# EAGLE board espduino-01-panel (EAGLE 7.1.0), part 1 of 2
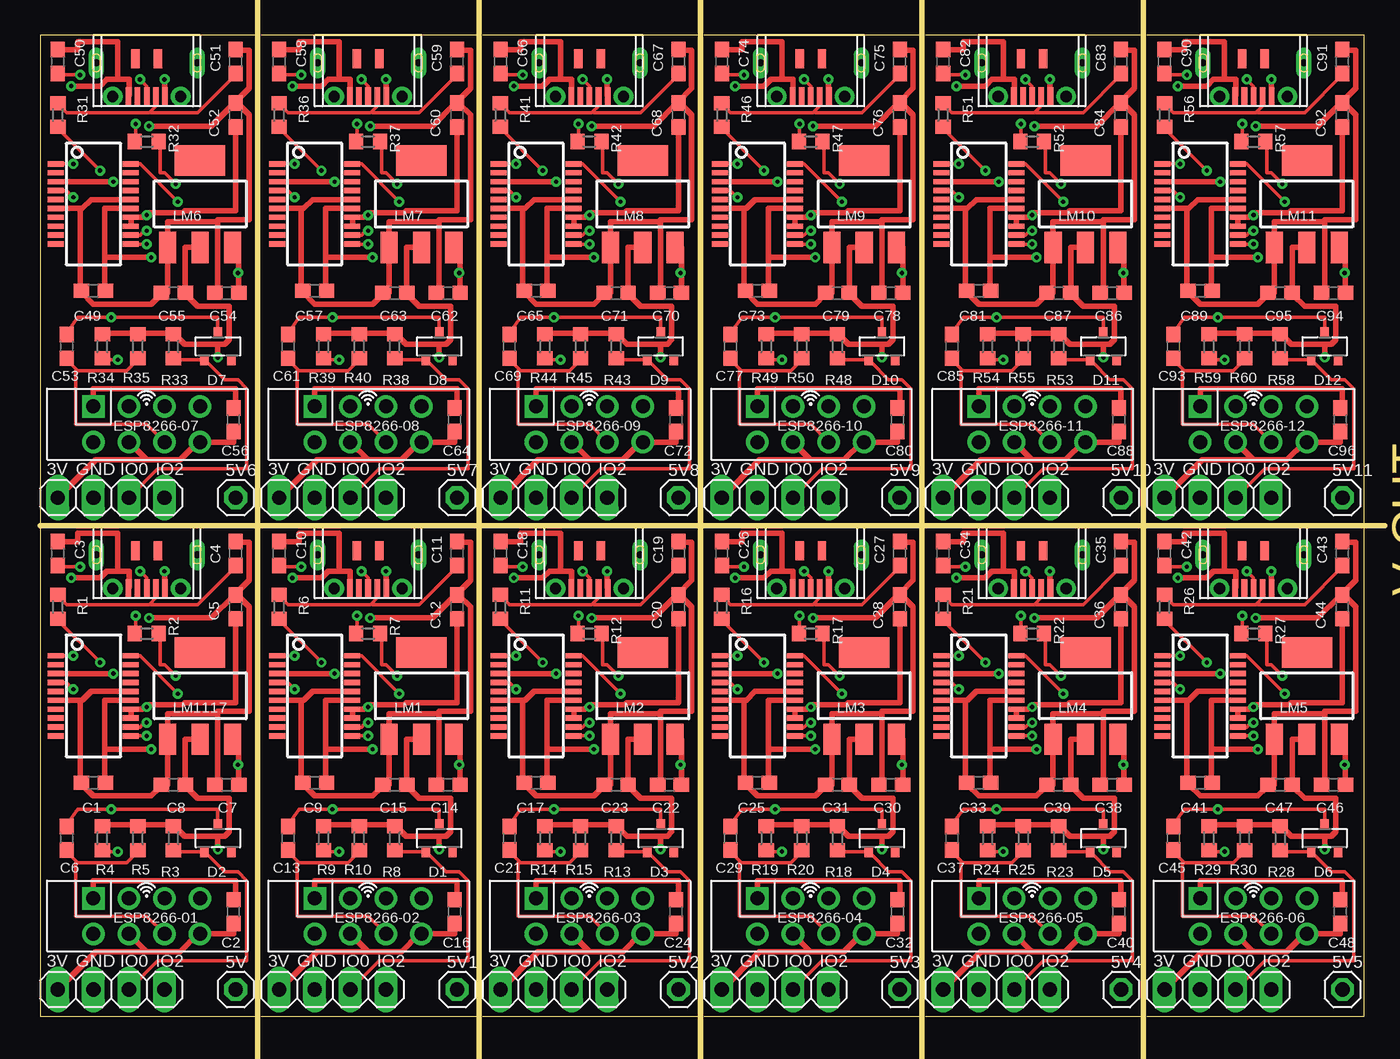
[diagram p0: board, top side]
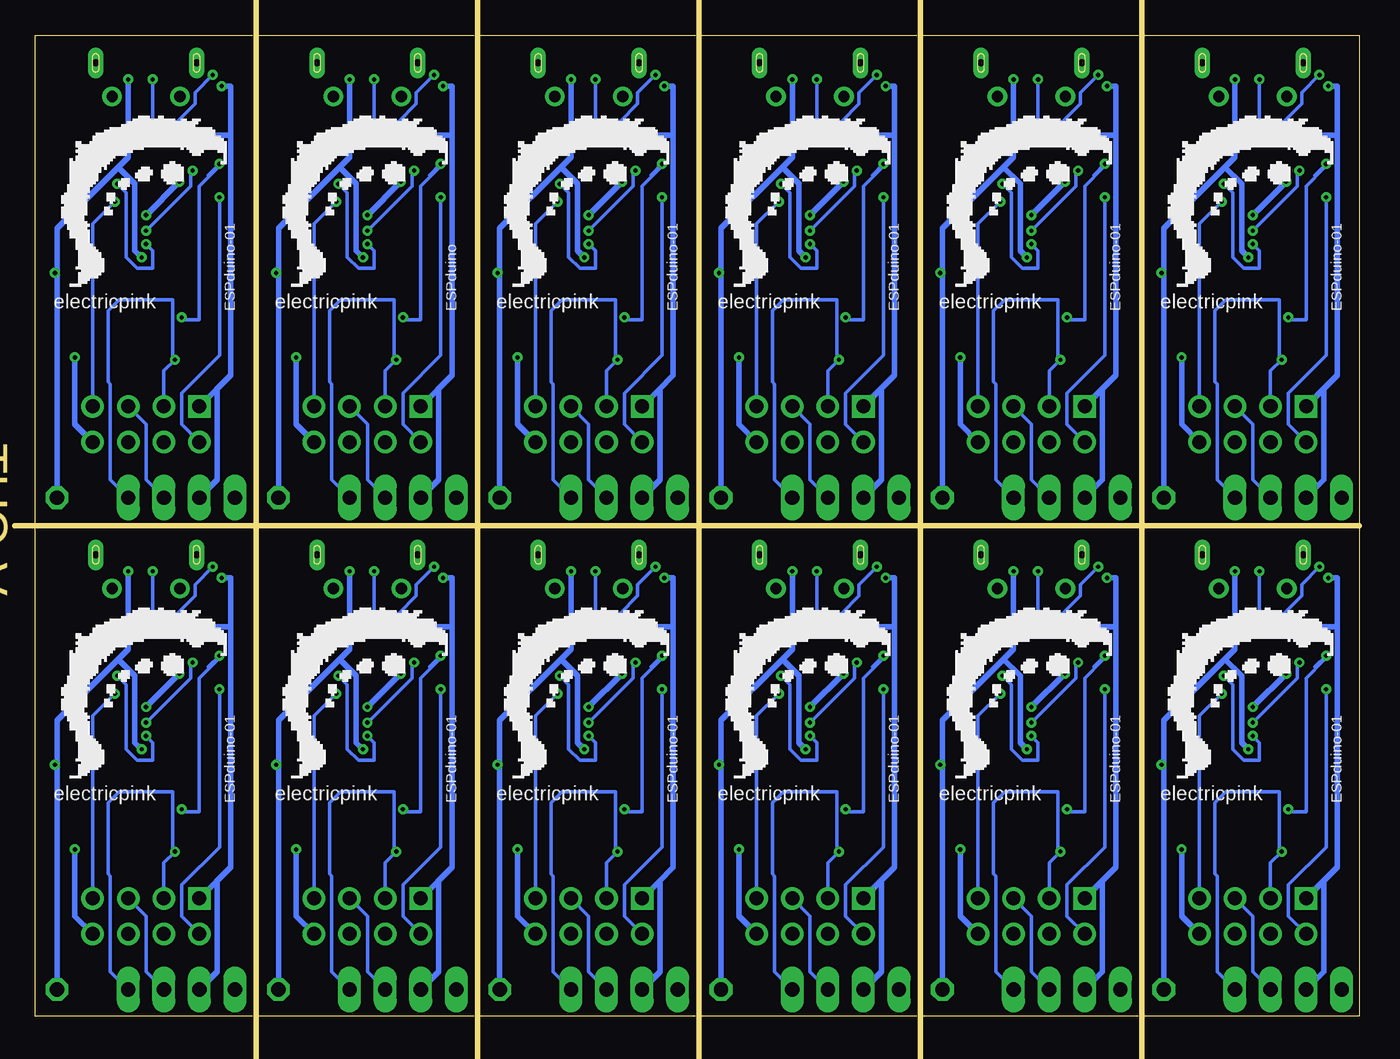
[diagram p1: board, bottom side, seen from below]

Size 94.55 x 70.02 mm. Coordinates in mm from the lower left corner, seen from the top.
Outline: 15.54,0 0,0 0,70.02 15.54,70.02
Outline: 15.8,0 31.34,0
Outline: 31.6,0 47.15,0
Outline: 47.4,0 62.95,0
Outline: 63.2,0 78.75,0
Outline: 79,0 94.55,0 94.55,70.02 79,70.02
Outline: 31.34,70.02 15.8,70.02
Outline: 47.15,70.02 31.6,70.02
Outline: 62.95,70.02 47.4,70.02
Outline: 78.75,70.02 63.2,70.02
Copper layers (1*16): Top 0.035mm / dielectric 1.5mm / Bottom 0.035mm
Design rules "SeeedStudio_2layer_conservative": minimum track width 8mil, minimum drill 12mil, track to track 8mil, track to pad 8mil, pad to pad 8mil, via to via 8mil, smd to smd 0mil, copper to edge 12mil, drill to drill 12mil, minimum pad ring 12mil, minimum via ring 8mil, stop-mask expansion 2mil, vias tented up to drill 100mil, thermal gap 12mil
Net classes: 0 default: width 0.254 mm; 1 POWER: width 0.406 mm
Milling: 6 lines

## Footprints (pad centres in the part's own frame; a part is rotated, then mirrored left to right if it is on the bottom)
1X01 = drill 1.016 octagon: 1 0,0
C0603 = smd 1.1 x 1: 1 -0.85,0; 2 0.85,0
SOT23-R = smd 0.6 x 0.7: 1 -0.95,-1; 2 0.95,-1; 3 0,1
1X04 = drill 1.016 long: 1 -3.81,0; 2 -1.27,0; 3 1.27,0; 4 3.81,0
ESP8266-01-MIN = drill 1: CH_PD -1.27,-1.27; GPIO0 1.27,1.27; GPIO2 -1.27,1.27; RST 1.27,-1.27; RXD 3.81,1.27; TXD -3.81,-1.27; VCC 3.81,-1.27 | drill 1 square: GND -3.81,1.27
SOT223 = smd 1.219 x 2.235: 1 -2.311,-3.099; 2 0,-3.099; 3 2.311,-3.099 | smd 3.6 x 2.2: 4 0,3.099
R0603 = smd 1 x 1.1: 1 -0.85,0; 2 0.85,0
SSOP20_L = smd 0.381 x 1.143: 1 -2.857,-2.68; 2 -2.223,-2.68; 3 -1.587,-2.68; 4 -0.953,-2.68; 5 -0.318,-2.68; 6 0.318,-2.68; 7 0.953,-2.68; 8 1.587,-2.68; 9 2.223,-2.68; 10 2.857,-2.68; 11 2.857,2.68; 12 2.223,2.68; 13 1.587,2.68; 14 0.953,2.68; 15 0.318,2.68; 16 -0.318,2.68; 17 -0.953,2.68; 18 -1.587,2.68; 19 -2.223,2.68; 20 -2.857,2.68
MICRO-USB-A01SB141B1 = smd 0.4 x 1.25: D+ 0,-4.375; D- 0.65,-4.375; GND -1.3,-4.375; ID -0.65,-4.375; VCC 1.3,-4.375 | smd 0.6 x 1.35: P$1 -0.8,-1.7; P$2 0.8,-1.7 | drill 0.8: P$8 -2.425,-4.4; P$9 2.425,-4.4 | drill 0.5 pad 1.1 long: P$10 -3.6,-2; P$12 3.6,-2

## Placement (x,y rotation side)
5V  [1X01]  13.97,1.91 0 top
5V1  [1X01]  29.77,1.91 0 top
5V2  [1X01]  45.57,1.91 0 top
5V3  [1X01]  61.37,1.91 0 top
5V4  [1X01]  77.17,1.91 0 top
5V5  [1X01]  92.97,1.91 0 top
5V6  [1X01]  13.97,37.01 0 top
5V7  [1X01]  29.77,37.01 0 top
5V8  [1X01]  45.57,37.01 0 top
5V9  [1X01]  61.37,37.01 0 top
5V10  [1X01]  77.17,37.01 0 top
5V11  [1X01]  92.97,37.01 0 top
C1  4.7uF  [C0603]  3.81,16.67 180 top
C2  10uF  [C0603]  13.81,7.46 90 top
C3  47pF  [C0603]  1.27,33.02 90 top
C4  47pF  [C0603]  13.97,33.02 90 top
C5  0.1uF  [C0603]  13.97,29.21 90 top
C6  0.1uf  [C0603]  1.91,12.7 90 top
C7  0.1uf  [C0603]  13.34,16.51 180 top
C8  0.1uf  [C0603]  9.53,16.51 180 top
C9  4.7uF  [C0603]  19.61,16.67 180 top
C10  47pF  [C0603]  17.07,33.02 90 top
C11  47pF  [C0603]  29.77,33.02 90 top
C12  0.1uF  [C0603]  29.77,29.21 90 top
C13  0.1uf  [C0603]  17.7,12.7 90 top
C14  0.1uf  [C0603]  29.14,16.51 180 top
C15  0.1uf  [C0603]  25.32,16.51 180 top
C16  10uF  [C0603]  29.61,7.46 90 top
C17  4.7uF  [C0603]  35.41,16.67 180 top
C18  47pF  [C0603]  32.87,33.02 90 top
C19  47pF  [C0603]  45.57,33.02 90 top
C20  0.1uF  [C0603]  45.57,29.21 90 top
C21  0.1uf  [C0603]  33.51,12.7 90 top
C22  0.1uf  [C0603]  44.94,16.51 180 top
C23  0.1uf  [C0603]  41.12,16.51 180 top
C24  10uF  [C0603]  45.41,7.46 90 top
C25  4.7uF  [C0603]  51.21,16.67 180 top
C26  47pF  [C0603]  48.67,33.02 90 top
C27  47pF  [C0603]  61.37,33.02 90 top
C28  0.1uF  [C0603]  61.37,29.21 90 top
C29  0.1uf  [C0603]  49.3,12.7 90 top
C30  0.1uf  [C0603]  60.73,16.51 180 top
C31  0.1uf  [C0603]  56.92,16.51 180 top
C32  10uF  [C0603]  61.21,7.46 90 top
C33  4.7uF  [C0603]  67.01,16.67 180 top
C34  47pF  [C0603]  64.47,33.02 90 top
C35  47pF  [C0603]  77.17,33.02 90 top
C36  0.1uF  [C0603]  77.17,29.21 90 top
C37  0.1uf  [C0603]  65.11,12.7 90 top
C38  0.1uf  [C0603]  76.53,16.51 180 top
C39  0.1uf  [C0603]  72.72,16.51 180 top
C40  10uF  [C0603]  77.01,7.46 90 top
C41  4.7uF  [C0603]  82.81,16.67 180 top
C42  47pF  [C0603]  80.27,33.02 90 top
C43  47pF  [C0603]  92.97,33.02 90 top
C44  0.1uF  [C0603]  92.97,29.21 90 top
C45  0.1uf  [C0603]  80.91,12.7 90 top
C46  0.1uf  [C0603]  92.33,16.51 180 top
C47  0.1uf  [C0603]  88.53,16.51 180 top
C48  10uF  [C0603]  92.81,7.46 90 top
C49  4.7uF  [C0603]  3.81,51.77 180 top
C50  47pF  [C0603]  1.27,68.12 90 top
C51  47pF  [C0603]  13.97,68.12 90 top
C52  0.1uF  [C0603]  13.97,64.31 90 top
C53  0.1uf  [C0603]  1.91,47.8 90 top
C54  0.1uf  [C0603]  13.34,51.61 180 top
C55  0.1uf  [C0603]  9.53,51.61 180 top
C56  10uF  [C0603]  13.81,42.56 90 top
C57  4.7uF  [C0603]  19.61,51.77 180 top
C58  47pF  [C0603]  17.07,68.12 90 top
C59  47pF  [C0603]  29.77,68.12 90 top
C60  0.1uF  [C0603]  29.77,64.31 90 top
C61  0.1uf  [C0603]  17.7,47.8 90 top
C62  0.1uf  [C0603]  29.14,51.61 180 top
C63  0.1uf  [C0603]  25.32,51.61 180 top
C64  10uF  [C0603]  29.61,42.56 90 top
C65  4.7uF  [C0603]  35.41,51.77 180 top
C66  47pF  [C0603]  32.87,68.12 90 top
C67  47pF  [C0603]  45.57,68.12 90 top
C68  0.1uF  [C0603]  45.57,64.31 90 top
C69  0.1uf  [C0603]  33.51,47.8 90 top
C70  0.1uf  [C0603]  44.94,51.61 180 top
C71  0.1uf  [C0603]  41.12,51.61 180 top
C72  10uF  [C0603]  45.41,42.56 90 top
C73  4.7uF  [C0603]  51.21,51.77 180 top
C74  47pF  [C0603]  48.67,68.12 90 top
C75  47pF  [C0603]  61.37,68.12 90 top
C76  0.1uF  [C0603]  61.37,64.31 90 top
C77  0.1uf  [C0603]  49.3,47.8 90 top
C78  0.1uf  [C0603]  60.73,51.61 180 top
C79  0.1uf  [C0603]  56.92,51.61 180 top
C80  10uF  [C0603]  61.21,42.56 90 top
C81  4.7uF  [C0603]  67.01,51.77 180 top
C82  47pF  [C0603]  64.47,68.12 90 top
C83  47pF  [C0603]  77.17,68.12 90 top
C84  0.1uF  [C0603]  77.17,64.31 90 top
C85  0.1uf  [C0603]  65.11,47.8 90 top
C86  0.1uf  [C0603]  76.53,51.61 180 top
C87  0.1uf  [C0603]  72.72,51.61 180 top
C88  10uF  [C0603]  77.01,42.56 90 top
C89  4.7uF  [C0603]  82.81,51.77 180 top
C90  47pF  [C0603]  80.27,68.12 90 top
C91  47pF  [C0603]  92.97,68.12 90 top
C92  0.1uF  [C0603]  92.97,64.31 90 top
C93  0.1uf  [C0603]  80.91,47.8 90 top
C94  0.1uf  [C0603]  92.33,51.61 180 top
C95  0.1uf  [C0603]  88.53,51.61 180 top
C96  10uF  [C0603]  92.81,42.56 90 top
D1  [SOT23-R]  28.5,12.7 0 top
D2  [SOT23-R]  12.7,12.7 0 top
D3  [SOT23-R]  44.3,12.7 0 top
D4  [SOT23-R]  60.1,12.7 0 top
D5  [SOT23-R]  75.9,12.7 0 top
D6  [SOT23-R]  91.7,12.7 0 top
D7  [SOT23-R]  12.7,47.8 0 top
D8  [SOT23-R]  28.5,47.8 0 top
D9  [SOT23-R]  44.3,47.8 0 top
D10  [SOT23-R]  60.1,47.8 0 top
D11  [SOT23-R]  75.9,47.8 0 top
D12  [SOT23-R]  91.7,47.8 0 top
ESP1  [1X04]  20.88,1.91 0 top
ESP2  [1X04]  36.68,1.91 0 top
ESP3  [1X04]  52.48,1.91 0 top
ESP4  [1X04]  68.28,1.91 0 top
ESP5  [1X04]  84.08,1.91 0 top
ESP6  [1X04]  5.08,37.01 0 top
ESP7  [1X04]  20.88,37.01 0 top
ESP8  [1X04]  36.68,37.01 0 top
ESP9  [1X04]  52.48,37.01 0 top
ESP10  [1X04]  68.28,37.01 0 top
ESP11  [1X04]  84.08,37.01 0 top
ESP8266  [1X04]  5.08,1.91 0 top
ESP8266-01  ESP8266ESP8266-01-MIN  [ESP8266-01-MIN]  7.62,7.14 0 top
ESP8266-02  ESP8266ESP8266-01-MIN  [ESP8266-01-MIN]  23.42,7.14 0 top
ESP8266-03  ESP8266ESP8266-01-MIN  [ESP8266-01-MIN]  39.22,7.14 0 top
ESP8266-04  ESP8266ESP8266-01-MIN  [ESP8266-01-MIN]  55.02,7.14 0 top
ESP8266-05  ESP8266ESP8266-01-MIN  [ESP8266-01-MIN]  70.82,7.14 0 top
ESP8266-06  ESP8266ESP8266-01-MIN  [ESP8266-01-MIN]  86.62,7.14 0 top
ESP8266-07  ESP8266ESP8266-01-MIN  [ESP8266-01-MIN]  7.62,42.24 0 top
ESP8266-08  ESP8266ESP8266-01-MIN  [ESP8266-01-MIN]  23.42,42.24 0 top
ESP8266-09  ESP8266ESP8266-01-MIN  [ESP8266-01-MIN]  39.22,42.24 0 top
ESP8266-10  ESP8266ESP8266-01-MIN  [ESP8266-01-MIN]  55.02,42.24 0 top
ESP8266-11  ESP8266ESP8266-01-MIN  [ESP8266-01-MIN]  70.82,42.24 0 top
ESP8266-12  ESP8266ESP8266-01-MIN  [ESP8266-01-MIN]  86.62,42.24 0 top
LM1  [SOT223]  27.23,22.86 0 top
LM2  [SOT223]  43.03,22.86 0 top
LM3  [SOT223]  58.83,22.86 0 top
LM4  [SOT223]  74.63,22.86 0 top
LM5  [SOT223]  90.43,22.86 0 top
LM6  [SOT223]  11.43,57.96 0 top
LM7  [SOT223]  27.23,57.96 0 top
LM8  [SOT223]  43.03,57.96 0 top
LM9  [SOT223]  58.83,57.96 0 top
LM10  [SOT223]  74.63,57.96 0 top
LM11  [SOT223]  90.43,57.96 0 top
LM1117  [SOT223]  11.43,22.86 0 top
R1  27  [R0603]  1.27,29.21 270 top
R2  27  [R0603]  7.62,27.3 180 top
R3  10k  [R0603]  9.53,12.7 90 top
R4  10k  [R0603]  4.45,12.7 90 top
R5  10k  [R0603]  6.99,12.7 90 top
R6  27  [R0603]  17.07,29.21 270 top
R7  27  [R0603]  23.42,27.3 180 top
R8  10k  [R0603]  25.32,12.7 90 top
R9  10k  [R0603]  20.25,12.7 90 top
R10  10k  [R0603]  22.79,12.7 90 top
R11  27  [R0603]  32.87,29.21 270 top
R12  27  [R0603]  39.22,27.3 180 top
R13  10k  [R0603]  41.12,12.7 90 top
R14  10k  [R0603]  36.05,12.7 90 top
R15  10k  [R0603]  38.59,12.7 90 top
R16  27  [R0603]  48.67,29.21 270 top
R17  27  [R0603]  55.02,27.3 180 top
R18  10k  [R0603]  56.92,12.7 90 top
R19  10k  [R0603]  51.84,12.7 90 top
R20  10k  [R0603]  54.38,12.7 90 top
R21  27  [R0603]  64.47,29.21 270 top
R22  27  [R0603]  70.82,27.3 180 top
R23  10k  [R0603]  72.72,12.7 90 top
R24  10k  [R0603]  67.64,12.7 90 top
R25  10k  [R0603]  70.19,12.7 90 top
R26  27  [R0603]  80.27,29.21 270 top
R27  27  [R0603]  86.62,27.3 180 top
R28  10k  [R0603]  88.53,12.7 90 top
R29  10k  [R0603]  83.44,12.7 90 top
R30  10k  [R0603]  85.98,12.7 90 top
R31  27  [R0603]  1.27,64.31 270 top
R32  27  [R0603]  7.62,62.41 180 top
R33  10k  [R0603]  9.53,47.8 90 top
R34  10k  [R0603]  4.45,47.8 90 top
R35  10k  [R0603]  6.99,47.8 90 top
R36  27  [R0603]  17.07,64.31 270 top
R37  27  [R0603]  23.42,62.41 180 top
R38  10k  [R0603]  25.32,47.8 90 top
R39  10k  [R0603]  20.25,47.8 90 top
R40  10k  [R0603]  22.79,47.8 90 top
R41  27  [R0603]  32.87,64.31 270 top
R42  27  [R0603]  39.22,62.41 180 top
R43  10k  [R0603]  41.12,47.8 90 top
R44  10k  [R0603]  36.05,47.8 90 top
R45  10k  [R0603]  38.59,47.8 90 top
R46  27  [R0603]  48.67,64.31 270 top
R47  27  [R0603]  55.02,62.41 180 top
R48  10k  [R0603]  56.92,47.8 90 top
R49  10k  [R0603]  51.84,47.8 90 top
R50  10k  [R0603]  54.38,47.8 90 top
R51  27  [R0603]  64.47,64.31 270 top
R52  27  [R0603]  70.82,62.41 180 top
R53  10k  [R0603]  72.72,47.8 90 top
R54  10k  [R0603]  67.64,47.8 90 top
R55  10k  [R0603]  70.19,47.8 90 top
R56  27  [R0603]  80.27,64.31 270 top
R57  27  [R0603]  86.62,62.41 180 top
R58  10k  [R0603]  88.53,47.8 90 top
R59  10k  [R0603]  83.44,47.8 90 top
R60  10k  [R0603]  85.98,47.8 90 top
U1  FT231XS  [SSOP20_L]  3.81,22.86 270 top
U2  [MICRO-USB-A01SB141B1]  7.62,34.92 0 top
U3  FT231XS  [SSOP20_L]  19.61,22.86 270 top
U4  [MICRO-USB-A01SB141B1]  23.42,34.92 0 top
U5  FT231XS  [SSOP20_L]  35.41,22.86 270 top
U6  [MICRO-USB-A01SB141B1]  39.22,34.92 0 top
U7  FT231XS  [SSOP20_L]  51.21,22.86 270 top
U8  [MICRO-USB-A01SB141B1]  55.02,34.92 0 top
U9  FT231XS  [SSOP20_L]  67.01,22.86 270 top
U10  [MICRO-USB-A01SB141B1]  70.82,34.92 0 top
U11  FT231XS  [SSOP20_L]  82.81,22.86 270 top
U12  [MICRO-USB-A01SB141B1]  86.62,34.92 0 top
U13  FT231XS  [SSOP20_L]  3.81,57.96 270 top
U14  [MICRO-USB-A01SB141B1]  7.62,70.03 0 top
U15  FT231XS  [SSOP20_L]  19.61,57.96 270 top
U16  [MICRO-USB-A01SB141B1]  23.42,70.03 0 top
U17  FT231XS  [SSOP20_L]  35.41,57.96 270 top
U18  [MICRO-USB-A01SB141B1]  39.22,70.03 0 top
U19  FT231XS  [SSOP20_L]  51.21,57.96 270 top
U20  [MICRO-USB-A01SB141B1]  55.02,70.03 0 top
U21  FT231XS  [SSOP20_L]  67.01,57.96 270 top
U22  [MICRO-USB-A01SB141B1]  70.82,70.03 0 top
U23  FT231XS  [SSOP20_L]  82.81,57.96 270 top
U24  [MICRO-USB-A01SB141B1]  86.62,70.03 0 top
U$1  [JUMPER-LOGO-X-SMALL]  8.89,25.4 0 top
U$2  [JUMPER-LOGO-X-SMALL]  24.69,25.4 0 top
U$3  [JUMPER-LOGO-X-SMALL]  40.49,25.4 0 top
U$4  [JUMPER-LOGO-X-SMALL]  56.29,25.4 0 top
U$5  [JUMPER-LOGO-X-SMALL]  72.09,25.4 0 top
U$6  [JUMPER-LOGO-X-SMALL]  87.89,25.4 0 top
U$7  [JUMPER-LOGO-X-SMALL]  8.89,60.5 0 top
U$8  [JUMPER-LOGO-X-SMALL]  24.69,60.5 0 top
U$9  [JUMPER-LOGO-X-SMALL]  40.49,60.5 0 top
U$10  [JUMPER-LOGO-X-SMALL]  56.29,60.5 0 top
U$11  [JUMPER-LOGO-X-SMALL]  72.09,60.5 0 top
U$12  [JUMPER-LOGO-X-SMALL]  87.89,60.5 0 top

## Library data of the parts
5V 5V1-5V11 ESP1-ESP11 ESP8266 = pinhead
C1-C96 R1-R60 = resistor
D1-D12 = adafruit
ESP8266-01-ESP8266-09 ESP8266-10-ESP8266-12 U2 U4 U6 U8 U10 U12 U14 U16 U18 U20 U22 U24 U$1-U$12 = jumper-parts
LM1-LM11 LM1117 = SparkFun-PowerIC; PROD_ID: VREG-08170
U1 U3 U5 U7 U9 U11 U13 U15 U17 U19 U21 U23 = SparkFun-DigitalIC

## Nets
3.3V [POWER]: C2.1 C8.1 ESP8266-01.CH_PD ESP8266-01.VCC ESP8266.1 LM1117.2 R3.2 R4.2 R5.2
3.3V1 [POWER]: C15.1 C16.1 ESP1.1 ESP8266-02.CH_PD ESP8266-02.VCC LM1.2 R8.2 R9.2 R10.2
3.3V2 [POWER]: C23.1 C24.1 ESP2.1 ESP8266-03.CH_PD ESP8266-03.VCC LM2.2 R13.2 R14.2 R15.2
3.3V3 [POWER]: C31.1 C32.1 ESP3.1 ESP8266-04.CH_PD ESP8266-04.VCC LM3.2 R18.2 R19.2 R20.2
3.3V4 [POWER]: C39.1 C40.1 ESP4.1 ESP8266-05.CH_PD ESP8266-05.VCC LM4.2 R23.2 R24.2 R25.2
3.3V5 [POWER]: C47.1 C48.1 ESP5.1 ESP8266-06.CH_PD ESP8266-06.VCC LM5.2 R28.2 R29.2 R30.2
3.3V6 [POWER]: C55.1 C56.1 ESP6.1 ESP8266-07.CH_PD ESP8266-07.VCC LM6.2 R33.2 R34.2 R35.2
3.3V7 [POWER]: C63.1 C64.1 ESP7.1 ESP8266-08.CH_PD ESP8266-08.VCC LM7.2 R38.2 R39.2 R40.2
3.3V8 [POWER]: C71.1 C72.1 ESP8.1 ESP8266-09.CH_PD ESP8266-09.VCC LM8.2 R43.2 R44.2 R45.2
3.3V9 [POWER]: C79.1 C80.1 ESP9.1 ESP8266-10.CH_PD ESP8266-10.VCC LM9.2 R48.2 R49.2 R50.2
3.3V10 [POWER]: C87.1 C88.1 ESP10.1 ESP8266-11.CH_PD ESP8266-11.VCC LM10.2 R53.2 R54.2 R55.2
3.3V11 [POWER]: C95.1 C96.1 ESP11.1 ESP8266-12.CH_PD ESP8266-12.VCC LM11.2 R58.2 R59.2 R60.2
5V [POWER]: 5V.1 C1.1 C7.1 LM1117.3 U1.15 U2.VCC
5V1 [POWER]: 5V1.1 C9.1 C14.1 LM1.3 U3.15 U4.VCC
5V2 [POWER]: 5V2.1 C17.1 C22.1 LM2.3 U5.15 U6.VCC
5V3 [POWER]: 5V3.1 C25.1 C30.1 LM3.3 U7.15 U8.VCC
5V4 [POWER]: 5V4.1 C33.1 C38.1 LM4.3 U9.15 U10.VCC
5V5 [POWER]: 5V5.1 C41.1 C46.1 LM5.3 U11.15 U12.VCC
5V6 [POWER]: 5V6.1 C49.1 C54.1 LM6.3 U13.15 U14.VCC
5V7 [POWER]: 5V7.1 C57.1 C62.1 LM7.3 U15.15 U16.VCC
5V8 [POWER]: 5V8.1 C65.1 C70.1 LM8.3 U17.15 U18.VCC
5V9 [POWER]: 5V9.1 C73.1 C78.1 LM9.3 U19.15 U20.VCC
5V10 [POWER]: 5V10.1 C81.1 C86.1 LM10.3 U21.15 U22.VCC
5V11 [POWER]: 5V11.1 C89.1 C94.1 LM11.3 U23.15 U24.VCC
CBUS0: U1.18
CBUS1: U3.19
CBUS2: U3.18
CBUS3: U1.19
CBUS4: U5.19
CBUS5: U5.18
CBUS6: U7.19
CBUS7: U7.18
CBUS8: U9.19
CBUS9: U9.18
CBUS10: U11.19
CBUS11: U11.18
CBUS12: U13.19
CBUS13: U13.18
CBUS14: U15.19
CBUS15: U15.18
CBUS16: U17.19
CBUS17: U17.18
CBUS18: U19.19
CBUS19: U19.18
CBUS20: U21.19
CBUS21: U21.18
CBUS22: U23.19
CBUS23: U23.18
CTS: U1.9
CTS1: U3.9
CTS2: U5.9
CTS3: U7.9
CTS4: U9.9
CTS5: U11.9
CTS6: U13.9
CTS7: U15.9
CTS8: U17.9
CTS9: U19.9
CTS10: U21.9
CTS11: U23.9
DCD: U1.8
DCD1: U3.8
DCD2: U5.8
DCD3: U7.8
DCD4: U9.8
DCD5: U11.8
DCD6: U13.8
DCD7: U15.8
DCD8: U17.8
DCD9: U19.8
DCD10: U21.8
DCD11: U23.8
DSR: U1.7
DSR1: U3.7
DSR2: U5.7
DSR3: U7.7
DSR4: U9.7
DSR5: U11.7
DSR6: U13.7
DSR7: U15.7
DSR8: U17.7
DSR9: U19.7
DSR10: U21.7
DSR11: U23.7
DTR: C6.2 D2.3 U1.1
DTR1: C13.2 D1.3 U3.1
DTR2: C21.2 D3.3 U5.1
DTR3: C29.2 D4.3 U7.1
DTR4: C37.2 D5.3 U9.1
DTR5: C45.2 D6.3 U11.1
DTR6: C53.2 D7.3 U13.1
DTR7: C61.2 D8.3 U15.1
DTR8: C69.2 D9.3 U17.1
DTR9: C77.2 D10.3 U19.1
DTR10: C85.2 D11.3 U21.1
DTR11: C93.2 D12.3 U23.1
GND [POWER]: C1.2 C2.2 C3.2 C4.2 C5.2 C7.2 C8.2 ESP8266-01.GND ESP8266.2 LM1117.1 U1.6 U1.16 U2.GND
GND1 [POWER]: C9.2 C10.2 C11.2 C12.2 C14.2 C15.2 C16.2 ESP1.2 ESP8266-02.GND LM1.1 U3.6 U3.16 U4.GND
GND2 [POWER]: C17.2 C18.2 C19.2 C20.2 C22.2 C23.2 C24.2 ESP2.2 ESP8266-03.GND LM2.1 U5.6 U5.16 U6.GND
GND3 [POWER]: C25.2 C26.2 C27.2 C28.2 C30.2 C31.2 C32.2 ESP3.2 ESP8266-04.GND LM3.1 U7.6 U7.16 U8.GND
GND4 [POWER]: C33.2 C34.2 C35.2 C36.2 C38.2 C39.2 C40.2 ESP4.2 ESP8266-05.GND LM4.1 U9.6 U9.16 U10.GND
GND5 [POWER]: C41.2 C42.2 C43.2 C44.2 C46.2 C47.2 C48.2 ESP5.2 ESP8266-06.GND LM5.1 U11.6 U11.16 U12.GND
GND6 [POWER]: C49.2 C50.2 C51.2 C52.2 C54.2 C55.2 C56.2 ESP6.2 ESP8266-07.GND LM6.1 U13.6 U13.16 U14.GND
GND7 [POWER]: C57.2 C58.2 C59.2 C60.2 C62.2 C63.2 C64.2 ESP7.2 ESP8266-08.GND LM7.1 U15.6 U15.16 U16.GND
GND8 [POWER]: C65.2 C66.2 C67.2 C68.2 C70.2 C71.2 C72.2 ESP8.2 ESP8266-09.GND LM8.1 U17.6 U17.16 U18.GND
GND9 [POWER]: C73.2 C74.2 C75.2 C76.2 C78.2 C79.2 C80.2 ESP9.2 ESP8266-10.GND LM9.1 U19.6 U19.16 U20.GND
GND10 [POWER]: C81.2 C82.2 C83.2 C84.2 C86.2 C87.2 C88.2 ESP10.2 ESP8266-11.GND LM10.1 U21.6 U21.16 U22.GND
GND11 [POWER]: C89.2 C90.2 C91.2 C92.2 C94.2 C95.2 C96.2 ESP11.2 ESP8266-12.GND LM11.1 U23.6 U23.16 U24.GND
GPIO0: D2.1 ESP8266-01.GPIO0 ESP8266.3 R3.1
GPIO1: D1.1 ESP1.3 ESP8266-02.GPIO0 R8.1
GPIO2: ESP8266-01.GPIO2 ESP8266.4 R4.1
GPIO3: ESP1.4 ESP8266-02.GPIO2 R9.1
GPIO4: D3.1 ESP2.3 ESP8266-03.GPIO0 R13.1
GPIO5: ESP2.4 ESP8266-03.GPIO2 R14.1
GPIO6: D4.1 ESP3.3 ESP8266-04.GPIO0 R18.1
GPIO7: ESP3.4 ESP8266-04.GPIO2 R19.1
GPIO8: D5.1 ESP4.3 ESP8266-05.GPIO0 R23.1
GPIO9: ESP4.4 ESP8266-05.GPIO2 R24.1
GPIO10: D6.1 ESP5.3 ESP8266-06.GPIO0 R28.1
GPIO11: ESP5.4 ESP8266-06.GPIO2 R29.1
GPIO12: D7.1 ESP6.3 ESP8266-07.GPIO0 R33.1
GPIO13: ESP6.4 ESP8266-07.GPIO2 R34.1
GPIO14: D8.1 ESP7.3 ESP8266-08.GPIO0 R38.1
GPIO15: ESP7.4 ESP8266-08.GPIO2 R39.1
GPIO16: D9.1 ESP8.3 ESP8266-09.GPIO0 R43.1
GPIO17: ESP8.4 ESP8266-09.GPIO2 R44.1
GPIO18: D10.1 ESP9.3 ESP8266-10.GPIO0 R48.1
GPIO19: ESP9.4 ESP8266-10.GPIO2 R49.1
GPIO20: D11.1 ESP10.3 ESP8266-11.GPIO0 R53.1
GPIO21: ESP10.4 ESP8266-11.GPIO2 R54.1
GPIO22: D12.1 ESP11.3 ESP8266-12.GPIO0 R58.1
GPIO23: ESP11.4 ESP8266-12.GPIO2 R59.1
N$1: R1.2 U1.12
N$2: R2.1 U1.11
N$3: C3.1 R2.2 U2.D+
N$4: C4.1 R1.1 U2.D-
N$5 [POWER]: C5.1 U1.3 U1.13 U1.14
N$6: R6.2 U3.12
N$7: R7.1 U3.11
N$8: C10.1 R7.2 U4.D+
N$9: C11.1 R6.1 U4.D-
N$10 [POWER]: C12.1 U3.3 U3.13 U3.14
N$11: R11.2 U5.12
N$12: R12.1 U5.11
N$13: C18.1 R12.2 U6.D+
N$14: C19.1 R11.1 U6.D-
N$15 [POWER]: C20.1 U5.3 U5.13 U5.14
N$16: R16.2 U7.12
N$17: R17.1 U7.11
N$18: C26.1 R17.2 U8.D+
N$19: C27.1 R16.1 U8.D-
N$20 [POWER]: C28.1 U7.3 U7.13 U7.14
N$21: R21.2 U9.12
N$22: R22.1 U9.11
N$23: C34.1 R22.2 U10.D+
N$24: C35.1 R21.1 U10.D-
N$25 [POWER]: C36.1 U9.3 U9.13 U9.14
N$26: R26.2 U11.12
N$27: R27.1 U11.11
N$28: C42.1 R27.2 U12.D+
N$29: C43.1 R26.1 U12.D-
N$30 [POWER]: C44.1 U11.3 U11.13 U11.14
N$31: R31.2 U13.12
N$32: R32.1 U13.11
N$33: C50.1 R32.2 U14.D+
N$34: C51.1 R31.1 U14.D-
N$35 [POWER]: C52.1 U13.3 U13.13 U13.14
N$36: R36.2 U15.12
N$37: R37.1 U15.11
N$38: C58.1 R37.2 U16.D+
N$39: C59.1 R36.1 U16.D-
N$40 [POWER]: C60.1 U15.3 U15.13 U15.14
N$41: R41.2 U17.12
N$42: R42.1 U17.11
N$43: C66.1 R42.2 U18.D+
N$44: C67.1 R41.1 U18.D-
N$45 [POWER]: C68.1 U17.3 U17.13 U17.14
N$46: R46.2 U19.12
N$47: R47.1 U19.11
N$48: C74.1 R47.2 U20.D+
N$49: C75.1 R46.1 U20.D-
N$50 [POWER]: C76.1 U19.3 U19.13 U19.14
N$51: R51.2 U21.12
N$52: R52.1 U21.11
N$53: C82.1 R52.2 U22.D+
N$54: C83.1 R51.1 U22.D-
N$55 [POWER]: C84.1 U21.3 U21.13 U21.14
N$56: R56.2 U23.12
N$57: R57.1 U23.11
N$58: C90.1 R57.2 U24.D+
N$59: C91.1 R56.1 U24.D-
N$60 [POWER]: C92.1 U23.3 U23.13 U23.14
RESET: C6.1 ESP8266-01.RST R5.1
RESET1: C13.1 ESP8266-02.RST R10.1
RESET2: C21.1 ESP8266-03.RST R15.1
RESET3: C29.1 ESP8266-04.RST R20.1
RESET4: C37.1 ESP8266-05.RST R25.1
RESET5: C45.1 ESP8266-06.RST R30.1
RESET6: C53.1 ESP8266-07.RST R35.1
RESET7: C61.1 ESP8266-08.RST R40.1
RESET8: C69.1 ESP8266-09.RST R45.1
RESET9: C77.1 ESP8266-10.RST R50.1
RESET10: C85.1 ESP8266-11.RST R55.1
RESET11: C93.1 ESP8266-12.RST R60.1
RI: U1.5
RI1: U3.5
RI2: U5.5
RI3: U7.5
RI4: U9.5
RI5: U11.5
RI6: U13.5
RI7: U15.5
RI8: U17.5
RI9: U19.5
RI10: U21.5
RI11: U23.5
RTS: U1.2
RTS1: U3.2
RTS2: U5.2
RTS3: U7.2
RTS4: U9.2
RTS5: U11.2
RTS6: U13.2
RTS7: U15.2
RTS8: U17.2
RTS9: U19.2
RTS10: U21.2
RTS11: U23.2
RXD: ESP8266-01.RXD U1.20
RXD1: ESP8266-02.RXD U3.20
RXD2: ESP8266-03.RXD U5.20
RXD3: ESP8266-04.RXD U7.20
RXD4: ESP8266-05.RXD U9.20
RXD5: ESP8266-06.RXD U11.20
RXD6: ESP8266-07.RXD U13.20
RXD7: ESP8266-08.RXD U15.20
RXD8: ESP8266-09.RXD U17.20
RXD9: ESP8266-10.RXD U19.20
RXD10: ESP8266-11.RXD U21.20
RXD11: ESP8266-12.RXD U23.20
TXD: ESP8266-01.TXD U1.4
TXD1: ESP8266-02.TXD U3.4
TXD2: ESP8266-03.TXD U5.4
TXD3: ESP8266-04.TXD U7.4
TXD4: ESP8266-05.TXD U9.4
TXD5: ESP8266-06.TXD U11.4
TXD6: ESP8266-07.TXD U13.4
TXD7: ESP8266-08.TXD U15.4
TXD8: ESP8266-09.TXD U17.4
TXD9: ESP8266-10.TXD U19.4
TXD10: ESP8266-11.TXD U21.4
TXD11: ESP8266-12.TXD U23.4